# Altium PCB LT3015_LT1963_TPS74401.PcbDoc
Units mm, origin at the board's own origin, x right, y up, seen from the top; angles counter-clockwise.
Board outline 80.01 x 57.15 mm, 2 copper layers (Top Layer, Bottom Layer); 31 components, 11 nets, 81 pads, 271 vias.
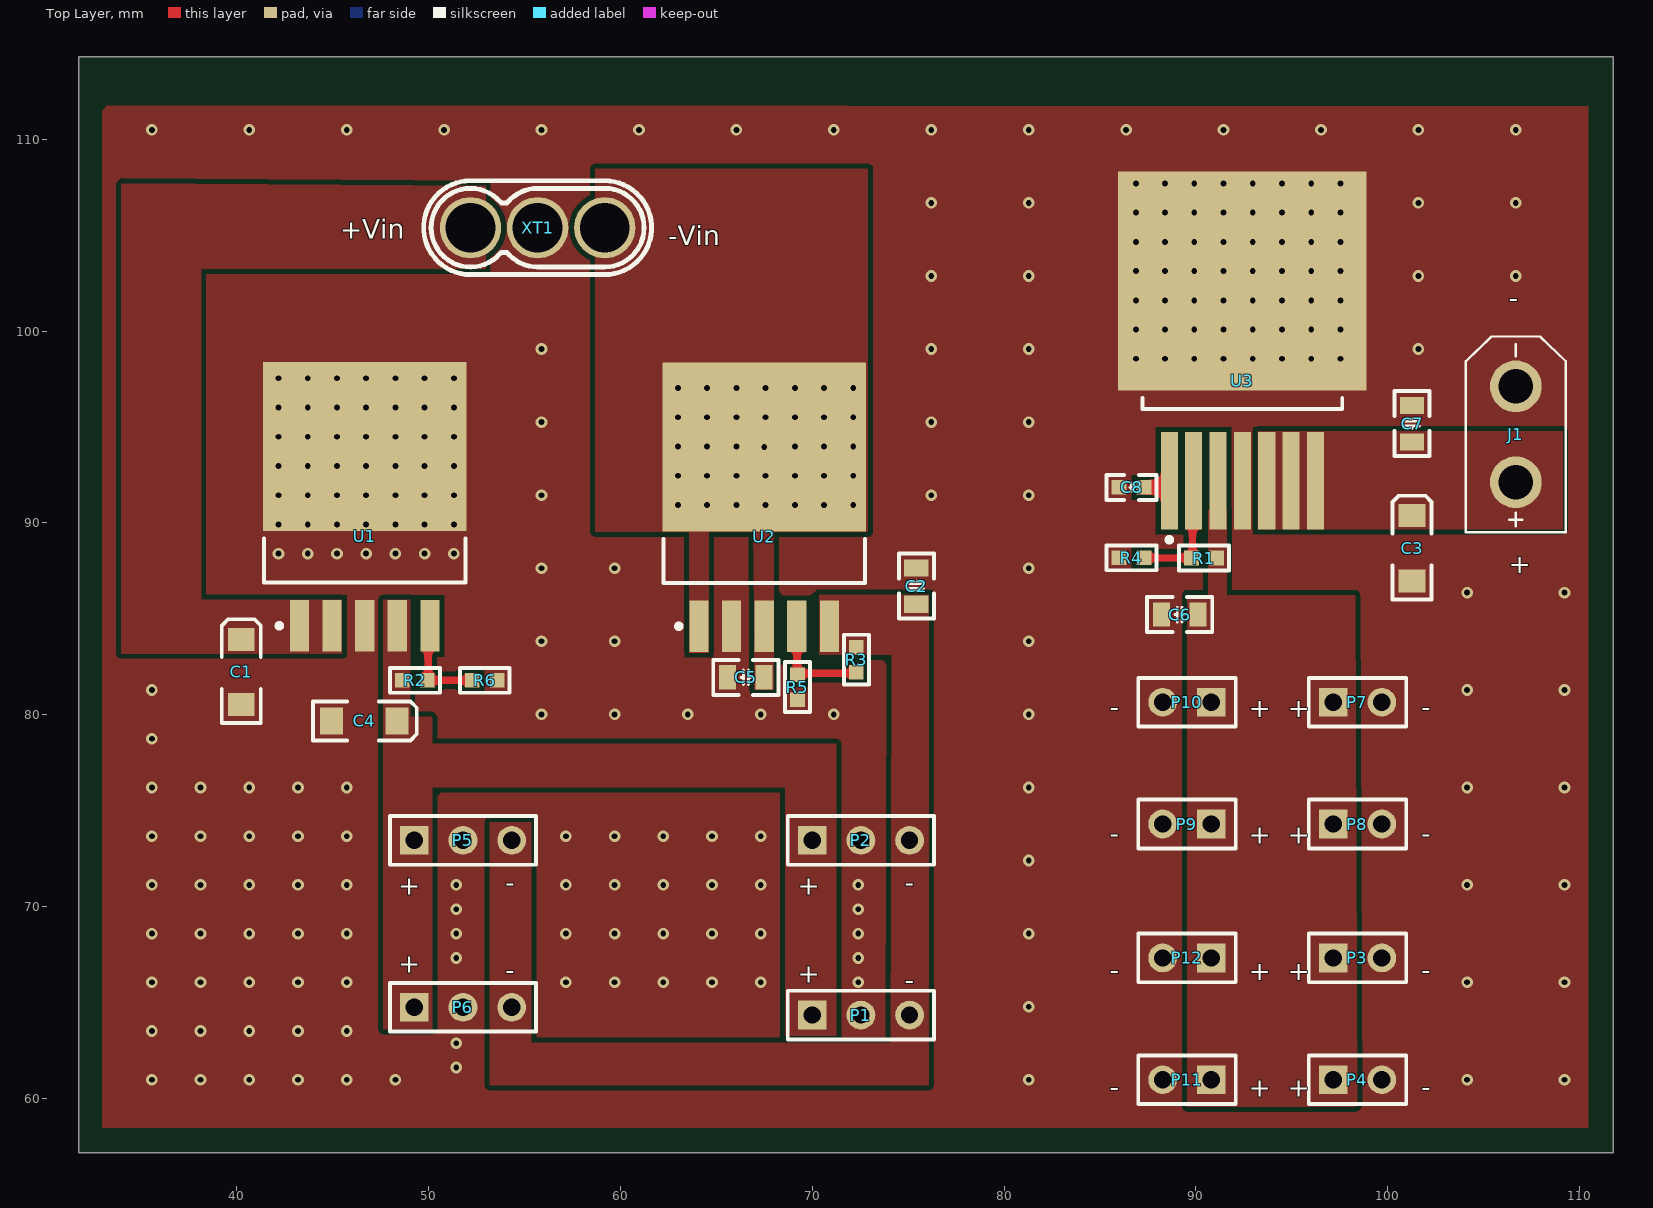
[diagram p0: Top Layer view]
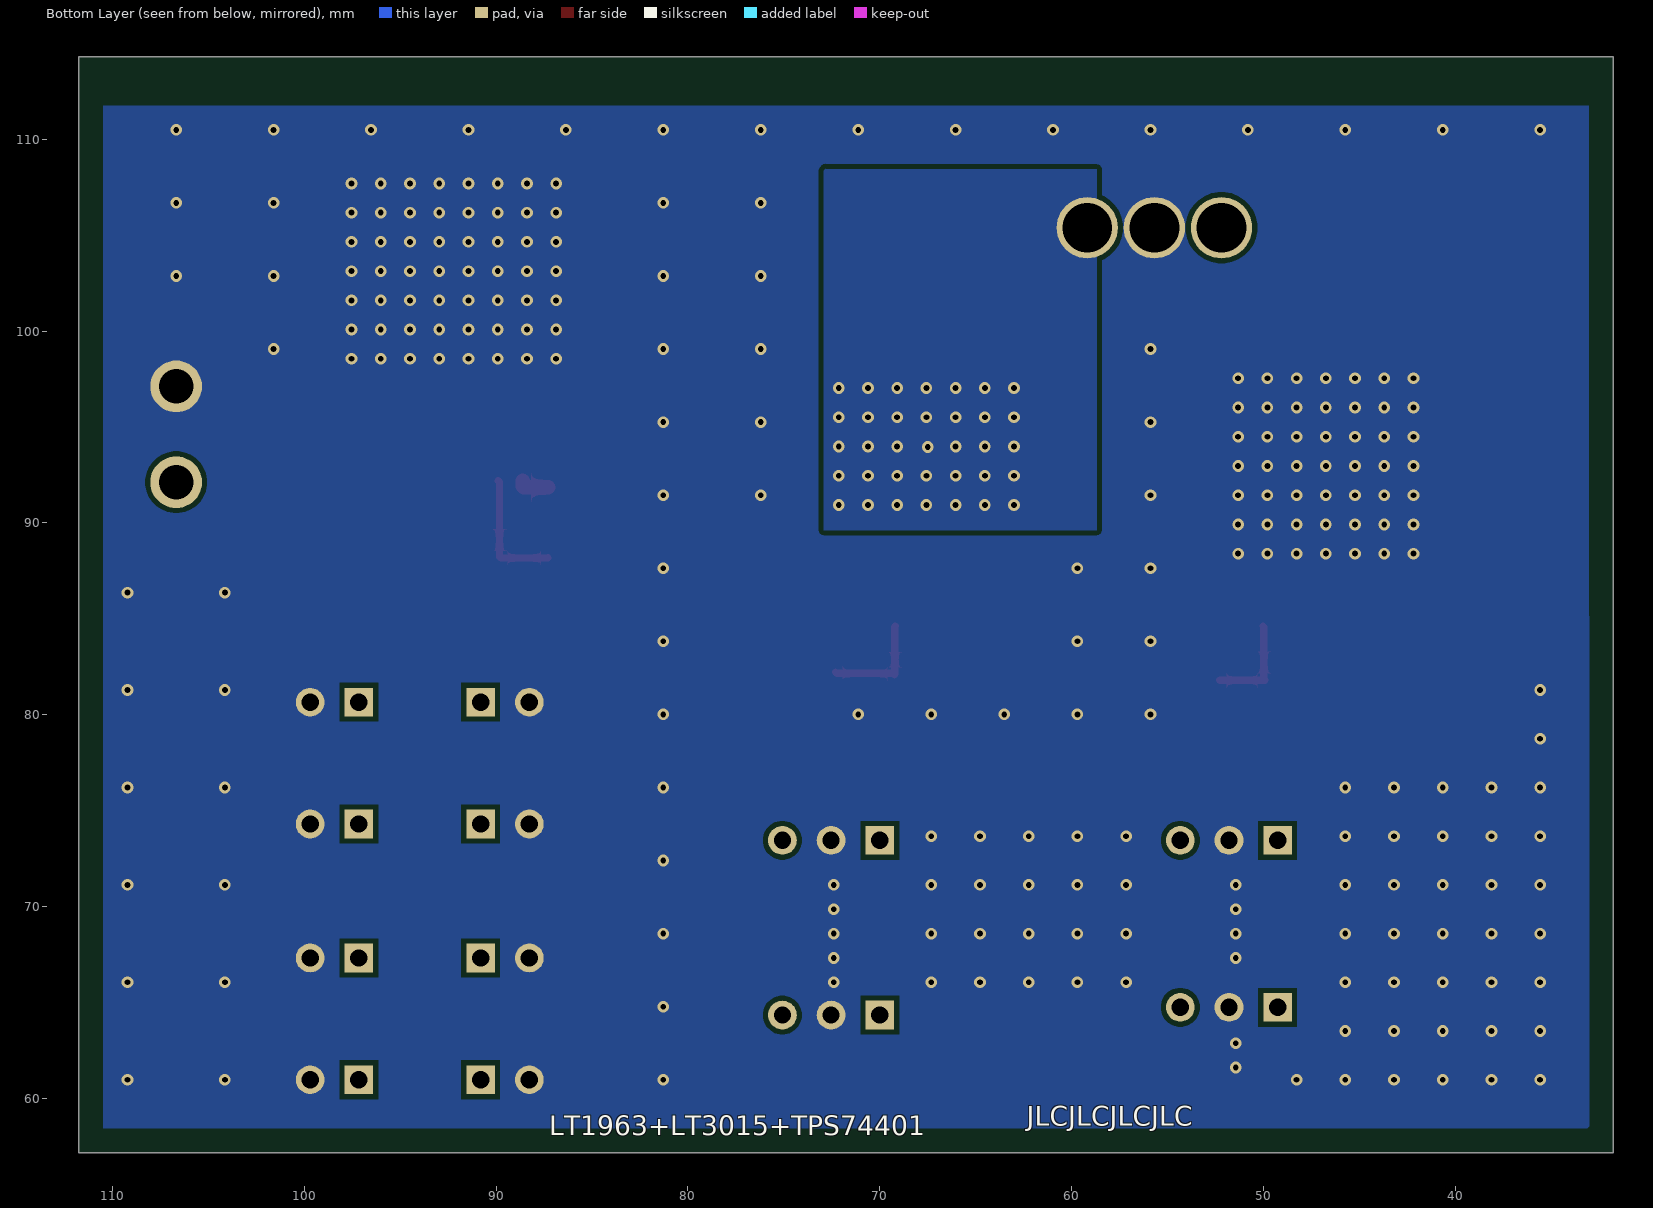
[diagram p1: Bottom Layer view, seen from below]

## Layer stack, top to bottom
Top Solder: solder mask 0.0102, Solder Resist, Dk 3.5
Top Layer: signal copper 0.0356
Dielectric 1: dielectric 0.32, FR-4, Dk 4.8
Bottom Layer: signal copper 0.0356
Bottom Solder: solder mask 0.0102, Solder Resist, Dk 3.5

## Board outline
31.75,57.15 31.75,114.3 111.76,114.3 111.76,57.15

## Design rules (kind name [scope] priority, off if disabled: settings)
Clearance [All] p1: gap=0.254 ignorepadtopadclearanceinfootprint=FALSE except(0: Arc-Hole Track-Hole SMDPad-Hole THPad-Hole Via-Hole Fill-Hole Poly-Hole Region-Hole Text-Hole)
PlaneConnect [All] p1: planeconnectstyle=Direct reliefexpansion=0.508 reliefentries=4 reliefconductorwidth=0.254 reliefairgap=0.254
PolygonConnect [All] p1: connectstyle=Direct reliefconductorwidth=0.254 reliefentries=4 polygonreliefangle="90 Angle" airgapwidth=0.254
RoutingVias [All] p1: holewidth=0.711 width=1.27 viastyle="Through Hole" minholewidth=0.711 minwidth=1.27 maxholewidth=0.711 maxwidth=1.27
SolderMaskExpansion [All] p1: expansion=0.102 istentingtop=FALSE
Width [All] p1: maxlimit=0.762 minlimit=0.254 preferedwidth=0.254
29 further rules are at their usual default settings.

## Components (designator, comment, footprint, x,y, rotation, side; value= is the part's Value field where it differs from the comment)
C1 "3.3uF/16V" "CD A(3216)" 40.226,82.226 r270 top
C2 "22uF/25V" "C 0805_L" 75.425,86.703 r270 top
C3 "10uF/16V" "CD A(3216)" 101.27,88.671 r270 top
C4 "22uF/16V" "CD A(3216)" 46.631,79.672 r180 top
C5 "10uF" "C 0805_L" 66.535,81.941 r0 top
C6 "22uF/25V" "C 0805_L" 89.154,85.217 r0 top
C7 "10uF/25V" "C 0805_L" 101.27,95.173 r90 top
C8 "1nF" "C 0603_L" 86.643,91.847 r0 top
J1 "XT30UPB-M" XT30UPB-M 106.68,94.615 r90 top
P1 "Header 3" HDR1X3 69.991,64.333 r0 top
P2 "Header 3" HDR1X3 69.991,73.443 r0 top
P3 "Header 2" HDR1X2 97.155,67.31 r0 top
P4 "Header 2" HDR1X2 97.155,60.96 r0 top
P5 "Header 3" HDR1X3 49.244,73.443 r0 top
P6 "Header 3" HDR1X3 49.244,64.737 r0 top
P7 "Header 2" HDR1X2 97.155,80.645 r0 top
P8 "Header 2" HDR1X2 97.155,74.295 r0 top
P9 "Header 2" HDR1X2 90.805,74.295 r180 top
P10 "Header 2" HDR1X2 90.805,80.645 r180 top
P11 "Header 2" HDR1X2 90.805,60.96 r180 top
P12 "Header 2" HDR1X2 90.805,67.31 r180 top
R1 "3.9K" "R 0603_L" 90.421,88.162 r180 top
R2 "18K" "R 0603_L" 49.276,81.788 r180 top
R3 "18K" "R 0603_L" 72.298,82.863 r90 top
R4 "1.2K" "R 0603_L" 86.641,88.176 r0 top
R5 "10K" "R 0603_L" 69.226,81.433 r90 top
R6 "10K" "R 0603_L" 52.919,81.788 r180 top
U1 "LT1963AEQ#TRPBF" LT-Q-5_L 46.66,90.83 r90 top
U2 "LT3015IQ#PBF" LT-Q-5_L 67.49,90.805 r90 top
U3 "TPS74401KTWR" FP-KTW0007A-MFG 92.423,100.632 r0 top
XT1 "MR30" CONN-TH_MR30-M 55.676,105.388 r0 top

## Footprints (in the part's own frame and the unit in brackets; to place one, negate y for a bottom-side part, rotate by r counter-clockwise, add the part's x,y. Pads: shape width x height; smd on the part's side, far side on the other; paste and mask are expansions set on the pad)
"C 0603_L" [mil] "无极性贴片电容"
  rect 30x30 smd: 1(-25.59,0) 2(25.59,0)
  silkscreen extent -51,-26 51,26, body extent -31,-16 31,16, height 32
"C 0805_L" [mil] "无极性贴片电容"
  rect 35x50 smd: 1(-37.4,0) 2(37.4,0)
  silkscreen extent -67,-36 67,36, body extent -39,-24 39,24, height 20
"CD A(3216)" [mm] "长3.2mm，宽1.6mm，厚1.6mm"
  rect 1.2x1.4 smd: 1(-1.7,0) 2(1.7,0)
  silkscreen extent -2.74,-1.02 2.67,1.02, body extent -1.6,-0.8 1.6,0.8, height 1.6
CONN-TH_MR30-M [mm]
  round 3.2 hole 2.6: 1(-3.5,0) 2(0,0) 3(3.5,0)
  silkscreen extent -5.94,-2.45 5.94,2.45
FP-KTW0007A-MFG [mil]
  rect 35x200 smd paste+0 mask+0: 1(-150,-332.03) 2(-100,-332.03) 3(-50,-332.03) 4(0,-332.03) 5(50,-332.03) 6(100,-332.03) 7(150,-332.03)
  rect 510x450 smd paste+0 mask+0: 8(0,77.97)
  silkscreen extent -205,-458 205,-162, body extent -259,-436 259,307, height 10
HDR1X2 [mm] "Connector; Header; 2 Position"
  rect 1.5x1.5 hole 0.9: 1(0,0)
  round 1.5 hole 0.9: 2(2.54,0)
  silkscreen extent -1.27,-1.27 3.81,1.27
HDR1X3 [mm] "Connector; Header; 3 Position"
  rect 1.5x1.5 hole 0.9: 1(0,0)
  round 1.5 hole 0.9: 2(2.54,0) 3(5.08,0)
  silkscreen extent -1.27,-1.27 6.35,1.27
LT-Q-5_L [mm] "DPAK, 5-Leads, Body 10.22x8.89mm, Pitch 1.702mm, IPC High Density"
  rect 2.7x1 smd: 1(-6.2,3.4) 2(-6.2,1.7)
  rect 2.7x1 smd mask+0.1: 3(-6.2,0) 4(-6.2,-1.7) 5(-6.2,-3.4)
  rect 8.8x10.6 smd mask+0.1: 6(3.15,0)
  silkscreen extent -6.32,-5.25 -1.65,5.25, body extent -3.95,-5.27 5.45,5.28, height 4.78
"R 0603_L" [mil] "1/10W贴片电阻 https://item.taobao.com/item.htm?ft=t&id=613637044352"
  rect 30x30 smd: 1(-25.59,0) 2(25.59,0)
  silkscreen extent -51,-26 51,26, body extent -31,-16 32,16, height 16
XT30UPB-M [mm]
  round 2.7 hole 1.8: P$1(-2.5,0) P$2(2.5,0)
  silkscreen extent -5.1,-2.6 5.1,2.6

## Part data
C1 C3 C4: library part CT, "贴片钽电容", BOM名称=贴片钽电容, 下单链接=https://item.taobao.com/item.htm?ft=t&id=613637044352, 淘宝ID=小糖豆的小窝窝
C2 C5 C6 C7 C8: library part C, "贴片电容", BOM名称=贴片电容, 下单链接=https://item.taobao.com/item.htm?ft=t&id=613637044352, 淘宝ID=小糖豆的小窝窝
J1: "Socket; DC supply; XT30; male; PIN: 2; on PCBs; THT; yellow; 15A; 500V", Package=None, Availability="Not in stock", MF=amass, MP=XT30UPB-M, Price=None
P1 P2 P5 P6: "Header, 3-Pin", LatestRevisionDate=17-Jul-2002, LatestRevisionNote="Re-released for DXP Platform.", Publisher="Altium Limited"
P3 P4 P7 P8 P9 P10 P11 P12: "Header, 2-Pin", LatestRevisionDate=17-Jul-2002, LatestRevisionNote="Re-released for DXP Platform.", Publisher="Altium Limited"
R1 R2 R3 R4 R5 R6: library part R, "贴片电阻", BOM名称=贴片电阻, 下单链接=https://item.taobao.com/item.htm?ft=t&id=613637044352, 淘宝ID=小糖豆的小窝窝
U1: library part CMP-0476-01133-1, "1.5 A, Low Noise, Fast Transient Response LDO Regulator, 2.1 to 20 V Vin, Adjustable Vout, 5-pin DPAK (Q-5), -40 to 125 degC, Pb-Free, Tape and Reel", Dropout Voltage(V)=0.34, Manufacturer="Linear Technology", Output Voltage=Adj, Shutdown Current(uA)=0.01, ComponentLink1Description="Manufacturer URL", ComponentLink1URL=http://www.linear.com/, ComponentLink2Description=Datasheet, ComponentLink2URL=http://cds.linear.com/docs/en/datasheet/1963afe.pdf, ComponentLink3Description="Package Specification", ComponentLink3URL=http://cds.linear.com/docs/en/packaging/Q%20DD5%2005-08-1461%20Rev%20F.pdf, DatasheetVersion="Rev. E", Discrete Pass Element=no, Iout(mA)=1500, Isupply(mA)=1, Mounting Technology="Surface Mount", Noise(uV)=40, Number of Outputs=1, PackageDescription="5-Pin Plastic DD Pak, Body 10.2235 x 8.89 mm, Pitch 1.702 mm", PackageReference=Q-5, PackageVersion="Rev. F, 09/2011", Packing="Tape and Reel", PartNumber=LT1963AEQ#TRPBF, PSRR(dB)=63, RoHS=TRUE, Vin Max(V)=20, Vin Min(V)=2.1, Vout Max(V)=20, Vout Min(V)=1.21
U2: library part CMP-0476-01078-1, "1.5 A, Low Noise, Negative Linear Regulator with Precision Current Limit, -1.8 to -30 V Vin, Adjustable Vout, 5-pin DPAK (Q-5), -40 to 125 degC, Pb-Free", Dropout Voltage(V)=0.31, Manufacturer="Linear Technology", Output Voltage=Adj, Shutdown Current(uA)=17, ComponentLink1Description="Manufacturer URL", ComponentLink1URL=http://www.linear.com/, ComponentLink2Description=Datasheet, ComponentLink2URL=http://cds.linear.com/docs/en/datasheet/3015fb.pdf, ComponentLink3Description="Package Specification", ComponentLink3URL=http://cds.linear.com/docs/en/packaging/Q%20DD5%2005-08-1461%20Rev%20F.pdf, DatasheetVersion="Rev. B", Discrete Pass Element=no, Iout(mA)=1500, Isupply(mA)=1.1, Mounting Technology="Surface Mount", Noise(uV)=60, Number of Outputs=1, PackageDescription="5-Pin Plastic DD Pak, Body 10.2235 x 8.89 mm, Pitch 1.702 mm", PackageReference=Q-5, PackageVersion="Rev. F, 09/2011", PartNumber=LT3015IQ#PBF, PSRR(dB)=65, RoHS=TRUE, Vin Max(V)=-1.8, Vin Min(V)=-30, Vout Max(V)=-1.22, Vout Min(V)=-29.3
U3: library part CMP-04917-000141-1, "IC REG LIN POS ADJ 3A DDPAK", Case/Package=TO-263, Dropout Voltage=120mV, Input Bias Current=2mA, Max Input Voltage=5.5V, Max Operating Temperature=125°C, Max Output Current=3A, Max Output Voltage=3.6V, Max Power Dissipation=5.32W, Min Current Limit=3.5A, Min Input Voltage=800mV, Min Operating Temperature=-40°C, Output Voltage Accuracy=1%, Package Quantity=1, Quiescent Current=3mA, Reference Voltage=804mV, Accuracy=1%, Contact Plating=Tin, Height=4.44mm, Lead Free="Lead Free", Length=10.1mm, Min Output Voltage=800mV, Mount="Surface Mount", Number of Outputs=1, Number of Pins=7, Number of Regulators=1, Output Current=3A, Output Type=Adjustable, Output Voltage=3.6V, Packaging="Tape and Reel", Polarity=Positive, Power Dissipation=5.32W, Radiation Hardening=No, RoHS Compliant=Yes, Series=-, Width=8.89mm

## Via types
v1: diameter 0.61, hole 0.305, Top Layer to Bottom Layer, tented both sides, 271 vias

## Nets (pads, with @x,y where several pads share a name; then routed paths per layer and width w, separated by ;. In a path a pad name is that pad's centre, name@x,y a point inside that pad or via, vN(x,y) a via of type N, cw(c..) or ccw(c..) an arc to the next point about the centre after c; other vN are vias at no path point)
+Vin: C1.1 U1.1 U1.2 XT1.1
+Vout: C4.1 P1.1 P2.1 P5.1 P6.1 R2.2 U1.4
-Vin: C5.2 U2.1 U2.3 U2.6 XT1.3
  other v1: 62.992,90.932 64.516,90.932 66.04,90.932 67.564,90.932 69.088,90.932 70.612,90.932 72.136,90.932 62.992,92.456 64.516,92.456 66.04,92.456 67.564,92.456 69.088,92.456 70.612,92.456 72.136,92.456 67.49,93.955 62.992,93.98 64.516,93.98 66.04,93.98 69.088,93.98 70.612,93.98 72.136,93.98 62.992,95.504 64.516,95.504 66.04,95.504 67.564,95.504 69.088,95.504 70.612,95.504 72.136,95.504 62.992,97.028 64.516,97.028 66.04,97.028 67.564,97.028 69.088,97.028 70.612,97.028 72.136,97.028
-Vout: C2.2 P1.3 P2.3 P5.3 P6.3 R3.2 U2.5
GND: C1.2 C2.1 C3.2 C4.2 C5.1 C6.1 C7.2 C8.1 J1.P$2 P1.2 P2.2 P3.2 P4.2 P5.2 P6.2 P7.2 P8.2 P9.2 P10.2 P11.2 P12.2 R4.1 R5.1 R6.1 U1.3 U1.6 U2.2 U3.4 U3.8 XT1.2
  other v1: 35.56,60.96 38.1,60.96 40.64,60.96 43.18,60.96 45.72,60.96 48.26,60.96 81.28,60.96 104.14,60.96 109.22,60.96 51.435,61.595 51.435,62.865 35.56,63.5 38.1,63.5 40.64,63.5 43.18,63.5 45.72,63.5 81.28,64.77 35.56,66.04 38.1,66.04 40.64,66.04 43.18,66.04 45.72,66.04 57.15,66.04 59.69,66.04 62.23,66.04 64.77,66.04 67.31,66.04 72.39,66.04 104.14,66.04 109.22,66.04 51.435,67.31 72.39,67.31 35.56,68.58 38.1,68.58 40.64,68.58 43.18,68.58 45.72,68.58 51.435,68.58 57.15,68.58 59.69,68.58 62.23,68.58 64.77,68.58 67.31,68.58 72.39,68.58 81.28,68.58 51.435,69.85 72.39,69.85 35.56,71.12 38.1,71.12 40.64,71.12 43.18,71.12 45.72,71.12 51.435,71.12 57.15,71.12 59.69,71.12 62.23,71.12 64.77,71.12 67.31,71.12 72.39,71.12 104.14,71.12 109.22,71.12 81.28,72.39 35.56,73.66 38.1,73.66 40.64,73.66 43.18,73.66 45.72,73.66 57.15,73.66 59.69,73.66 62.23,73.66 64.77,73.66 67.31,73.66 35.56,76.2 38.1,76.2 40.64,76.2 43.18,76.2 45.72,76.2 81.28,76.2 104.14,76.2 109.22,76.2 35.56,78.74 55.88,80.01 59.69,80.01 63.5,80.01 67.31,80.01 71.12,80.01 81.28,80.01 35.56,81.28 104.14,81.28 109.22,81.28 55.88,83.82 59.69,83.82 81.28,83.82 104.14,86.36 109.22,86.36 55.88,87.63 59.69,87.63 81.28,87.63 42.164,88.392 43.688,88.392 45.212,88.392 46.736,88.392 48.26,88.392 49.784,88.392 51.308,88.392 42.164,89.916 43.688,89.916 45.212,89.916 46.736,89.916 48.26,89.916 49.784,89.916 51.308,89.916 42.164,91.44 43.688,91.44 45.212,91.44 46.736,91.44 48.26,91.44 49.784,91.44 51.308,91.44 55.88,91.44 76.2,91.44 81.28,91.44 42.164,92.964 43.688,92.964 45.212,92.964 46.736,92.964 48.26,92.964 49.784,92.964 51.308,92.964 42.164,94.488 43.688,94.488 45.212,94.488 46.736,94.488 48.26,94.488 49.784,94.488 51.308,94.488 55.88,95.25 76.2,95.25 81.28,95.25 42.164,96.012 43.688,96.012 45.212,96.012 46.736,96.012 48.26,96.012 49.784,96.012 51.308,96.012 42.164,97.536 43.688,97.536 45.212,97.536 46.736,97.536 48.26,97.536 49.784,97.536 51.308,97.536 86.868,98.552 88.392,98.552 89.916,98.552 91.44,98.552 92.964,98.552 94.488,98.552 96.012,98.552 97.536,98.552 55.88,99.06 76.2,99.06 81.28,99.06 101.6,99.06 86.868,100.076 88.392,100.076 89.916,100.076 91.44,100.076 92.964,100.076 94.488,100.076 96.012,100.076 97.536,100.076 86.868,101.6 88.392,101.6 89.916,101.6 91.44,101.6 92.964,101.6 94.488,101.6 96.012,101.6 97.536,101.6 76.2,102.87 81.28,102.87 101.6,102.87 106.68,102.87 86.868,103.124 88.392,103.124 89.916,103.124 91.44,103.124 92.964,103.124 94.488,103.124 96.012,103.124 97.536,103.124 86.868,104.648 88.392,104.648 89.916,104.648 91.44,104.648 92.964,104.648 94.488,104.648 96.012,104.648 97.536,104.648 86.868,106.172 88.392,106.172 89.916,106.172 91.44,106.172 92.964,106.172 94.488,106.172 96.012,106.172 97.536,106.172 76.2,106.68 81.28,106.68 101.6,106.68 106.68,106.68 86.868,107.696 88.392,107.696 89.916,107.696 91.44,107.696 92.964,107.696 94.488,107.696 96.012,107.696 97.536,107.696 35.56,110.49 40.64,110.49 45.72,110.49 50.8,110.49 55.88,110.49 60.96,110.49 66.04,110.49 71.12,110.49 76.2,110.49 81.28,110.49 86.36,110.49 91.44,110.49 96.52,110.49 101.6,110.49 106.68,110.49
NetC8_2: C8.2 U3.1 | length 1.7
  Top Layer w0.381: U3.1@88.59,92.177 U3.1
  Top Layer w0.762: C8.2 88.549,91.847 88.613,91.911 U3.1
NetR1_2: R1.2 R4.2 U3.2 | length 6.6
  Top Layer w0.381: R4.2 87.298,88.169 89.764,88.169 R1.2 89.827,88.218 89.827,92.143 U3.2
NetR2_1: R2.1 R6.2 U1.5 | length 5.2
  Top Layer w0.381: U1.5@50.009,84.605 49.968,84.564 49.968,81.83 R2.1 R6.2
NetR3_1: R3.1 R5.2 U2.4 | length 5.7
  Top Layer w0.381: U2.4 69.208,84.587 69.208,82.101 R5.2 69.291,82.148 72.233,82.148 R3.1
Vin: C3.1 C7.1 J1.P$1 U3.5 U3.6 U3.7
Vout: C6.2 P3.1 P4.1 P7.1 P8.1 P9.1 P10.1 P11.1 P12.1 R1.1 U3.3

## Polygon pours and split planes (outlines as drawn)
GND on Top Layer "NONET_L-01_P-001" (solid, remove dead copper, pour order 27): 33.02,111.76 32.969,111.709 32.969,58.445 110.49,58.445 110.465,58.471 110.465,111.709
-Vin on Top Layer "NONET_L-01_P-001" (solid, remove dead copper, pour order 26): 63.59,83.255 63.59,89.701 63.627,89.738 64.592,89.738 64.592,83.26
+Vout on Top Layer "NONET_L-01_P-001" (solid, pour order 22): 71.247,78.486 49.657,78.486 49.657,76.2 49.911,76.2 71.247,76.2
+Vout on Top Layer "NONET_L-01_P-001" (solid, remove dead copper, pour order 21): 68.58,77.47 68.58,63.246 71.247,63.246 71.247,77.47
Vout on Top Layer "NONET_L-01_P-001" (solid, remove dead copper, pour order 18): 98.303,86.233 89.555,86.233 89.555,59.563 98.405,59.563
+Vout on Top Layer "NONET_L-01_P-001" (solid, remove dead copper, pour order 17): 47.625,79.883 47.625,63.602 50.19,63.602 50.19,79.908
-Vout on Top Layer "NONET_L-01_P-001" (solid, pour order 16): 53.188,62.89 76.073,62.89 76.073,60.681 53.188,60.681
-Vout on Top Layer "NONET_L-01_P-001" (solid, remove dead copper, pour order 15): 53.188,74.397 53.188,60.681 55.347,60.681 55.347,60.731 55.347,74.397
-Vout on Top Layer "NONET_L-01_P-001" (solid, remove dead copper, pour order 14): 74.085,60.782 74.143,83.591 76.073,83.591 76.073,60.782
-Vout on Top Layer "NONET_L-01_P-001" (solid, remove dead copper, pour order 13): 70.358,83.109 76.073,83.109 76.073,86.258 70.358,86.258
Vout on Top Layer "NONET_L-01_P-001" (solid, remove dead copper, pour order 12): 90.653,90.678 90.653,59.944 91.618,59.944 91.618,90.678
GND on Top Layer "NONET_L-01_P-001" (solid, remove dead copper, pour order 11): 91.98,94.642 92.864,94.642 92.864,99.163 91.98,99.163
Vin on Top Layer "NONET_L-01_P-001" (solid, remove dead copper, pour order 9): 93.218,94.767 93.218,89.662 109.118,89.662 109.118,94.767
-Vin on Top Layer "NONET_L-01_P-001" (solid, remove dead copper, pour order 8): 66.98,84.125 66.98,81.305 67.985,81.305 67.995,84.125
no net on Top Layer "NONET_L-01_P-001" (solid, remove dead copper, pour order 6): 63.59,83.255 64.59,83.255 64.59,83.256
-Vin on Top Layer "NONET_L-01_P-001" (solid, remove dead copper, pour order 5): 66.991,83.256 66.992,83.255 67.992,83.255 67.992,89.789 66.929,89.789
-Vin on Top Layer "NONET_L-01_P-001" (solid, remove dead copper, pour order 4): 58.674,108.458 58.674,89.535 72.898,89.535 72.898,108.458
+Vout on Top Layer "NONET_L-01_P-001" (solid, remove dead copper, pour order 3): 47.625,85.979 47.625,78.867 49.022,78.867 49.022,85.979
GND on Top Layer "NONET_L-01_P-001" (solid, remove dead copper, pour order 2): 46.101,85.598 47.117,85.598 47.117,89.662 46.101,89.662
+Vin on Top Layer "NONET_L-01_P-001" (solid, remove dead copper, pour order 1): 52.959,107.569 52.959,103.251 38.125,103.251 38.125,85.344 33.96,85.344 33.96,107.712
+Vin on Top Layer "NONET_L-01_P-001" (solid, remove dead copper, pour order 0): 45.466,85.979 33.96,85.979 33.96,83.185 45.466,83.185
GND on Bottom Layer "NONET_L-01_P-001" (solid, pour order 25): 33.021,111.756 110.461,111.756 110.49,111.785 110.49,58.42 33.02,58.42 32.995,58.445
-Vin on Bottom Layer "NONET_L-01_P-001" (solid, remove dead copper, pour order 24): 58.674,108.433 58.674,89.611 72.923,89.611 72.923,108.458
no net on Bottom Solder "NONET_L-01_P-001" (solid): 89.154,106.131 89.154,99.825 95.58,99.825 95.606,99.851 95.606,106.162
no net on Bottom Solder "NONET_L-01_P-001" (solid): 64.465,97.012 64.465,90.707 70.891,90.707 70.917,90.732 70.917,97.044
no net on Bottom Solder "NONET_L-01_P-001" (solid): 43.637,96.733 43.637,90.427 50.063,90.427 50.089,90.453 50.089,96.764

## Silkscreen, mask and mechanical layers (free items; w line width, h text height)
Top Overlay:
  text "+Vin" at 45.39,104.8 h1.02
  text "-Vin" at 62.484,104.47 h1.02
  text "-" at 106.324,101.245 h1.02
  text "+" at 106.324,87.359 h1.02
  text "-" at 85.496,79.909 h1.02
  text "-" at 101.752,79.909 h1.02
  text "+" at 92.759,79.874 h1.02
  text "+" at 94.791,79.874 h1.02
  text "-" at 85.496,73.305 h1.02
  text "-" at 101.752,73.305 h1.02
  text "+" at 92.759,73.27 h1.02
  text "+" at 94.791,73.27 h1.02
  text "-" at 54,70.765 h1.02
  text "-" at 74.828,70.765 h1.02
  text "+" at 48.412,70.595 h1.02
  text "+" at 69.24,70.595 h1.02
  text "+" at 48.412,66.531 h1.02
  text "-" at 54,66.193 h1.02
  text "-" at 85.496,66.193 h1.02
  text "-" at 101.752,66.193 h1.02
  text "+" at 92.759,66.158 h1.02
  text "+" at 94.791,66.158 h1.02
  text "+" at 69.24,66.023 h1.02
  text "-" at 74.828,65.685 h1.02
  text "-" at 85.496,60.097 h1.02
  text "-" at 101.752,60.097 h1.02
  text "+" at 92.759,60.062 h1.02
  text "+" at 94.791,60.062 h1.02
Bottom Overlay:
  text "JLCJLCJLCJLC" at 62.332,58.572 h1.02
  text "LT1963+LT3015+TPS74401" at 87.224,58.064 h1.02
Mechanical 1:
  the board outline again, w0.254